# Altium PCB RC_Filters_MicroD.PcbDoc
Units mm, origin at the board's own origin, x right, y up, seen from the top; angles counter-clockwise.
Board outline 25 x 45 mm, 2 copper layers (Top Layer, Bottom Layer); 52 components, 51 nets, 156 pads, 85 vias.
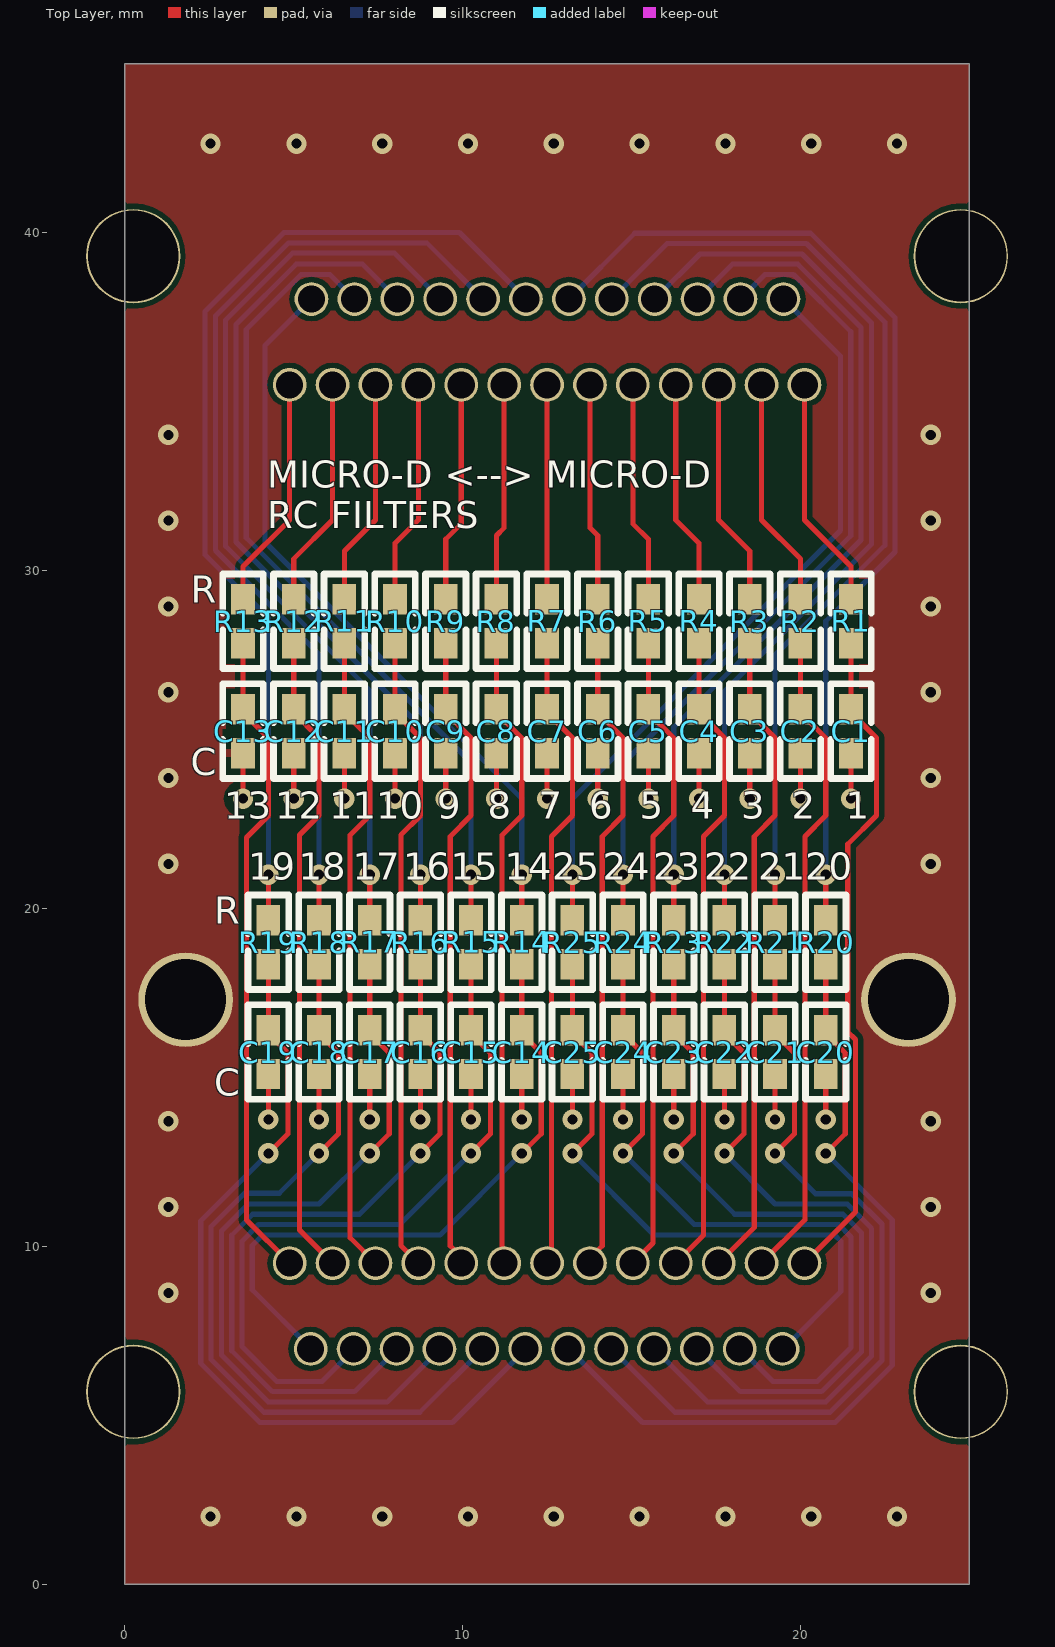
[diagram p0: Top Layer view]
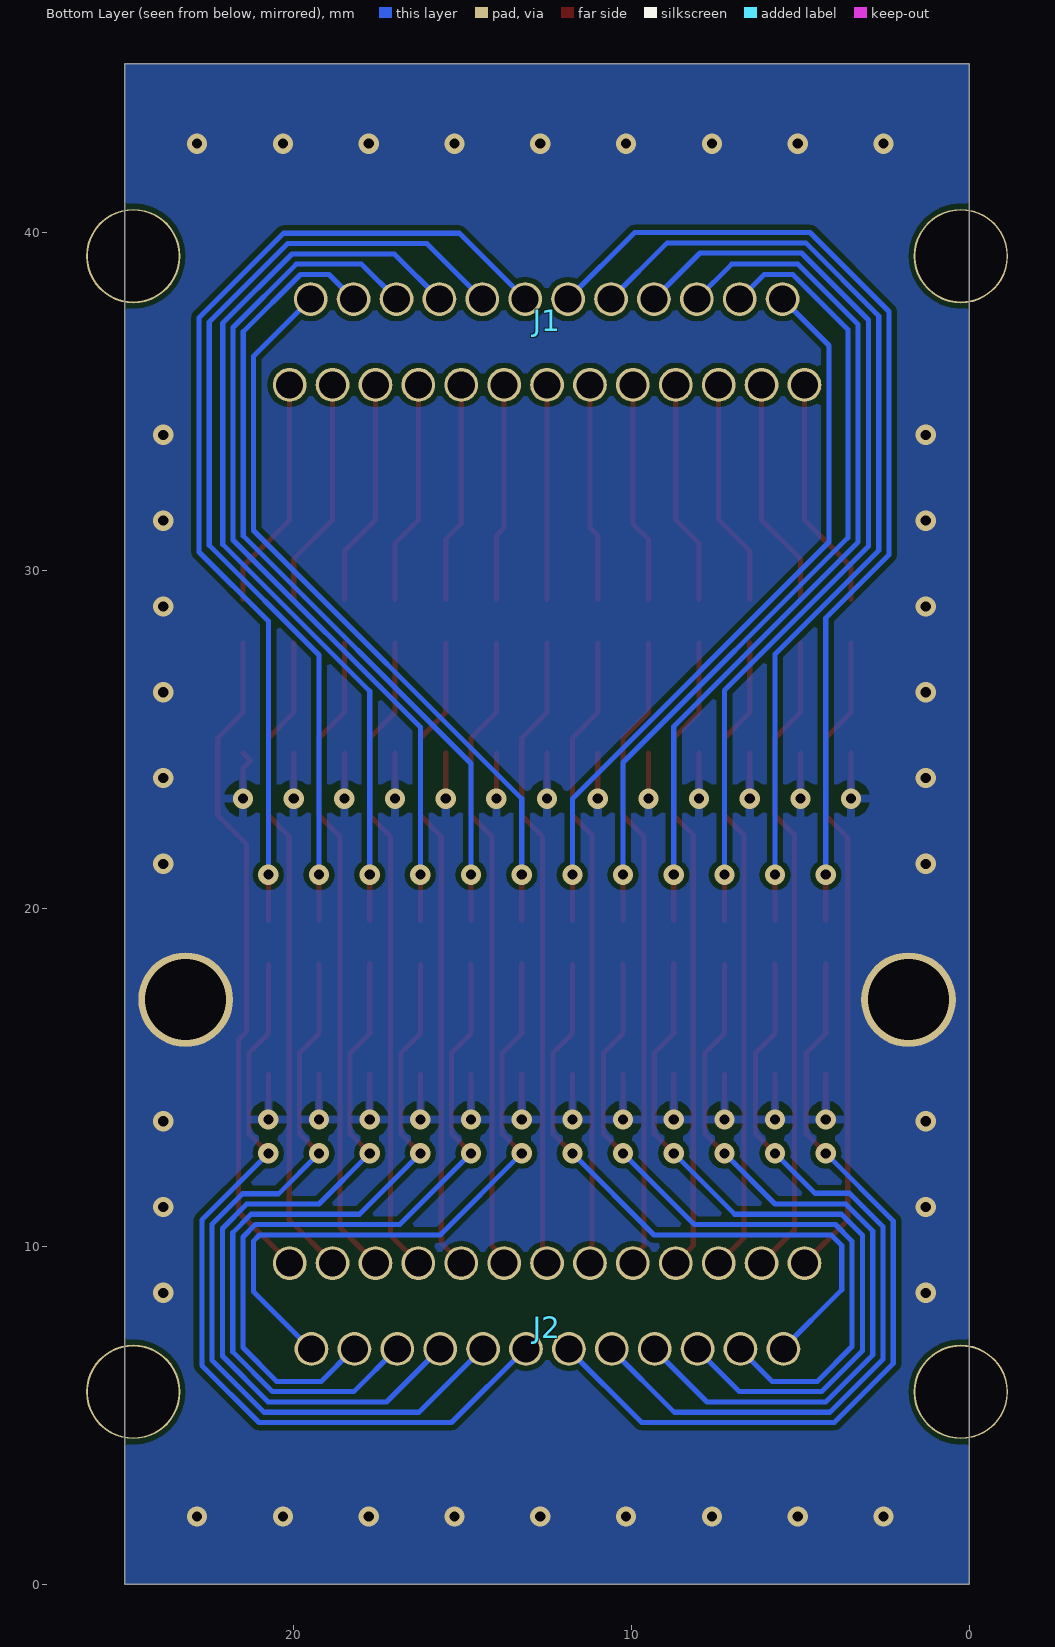
[diagram p1: Bottom Layer view, seen from below]
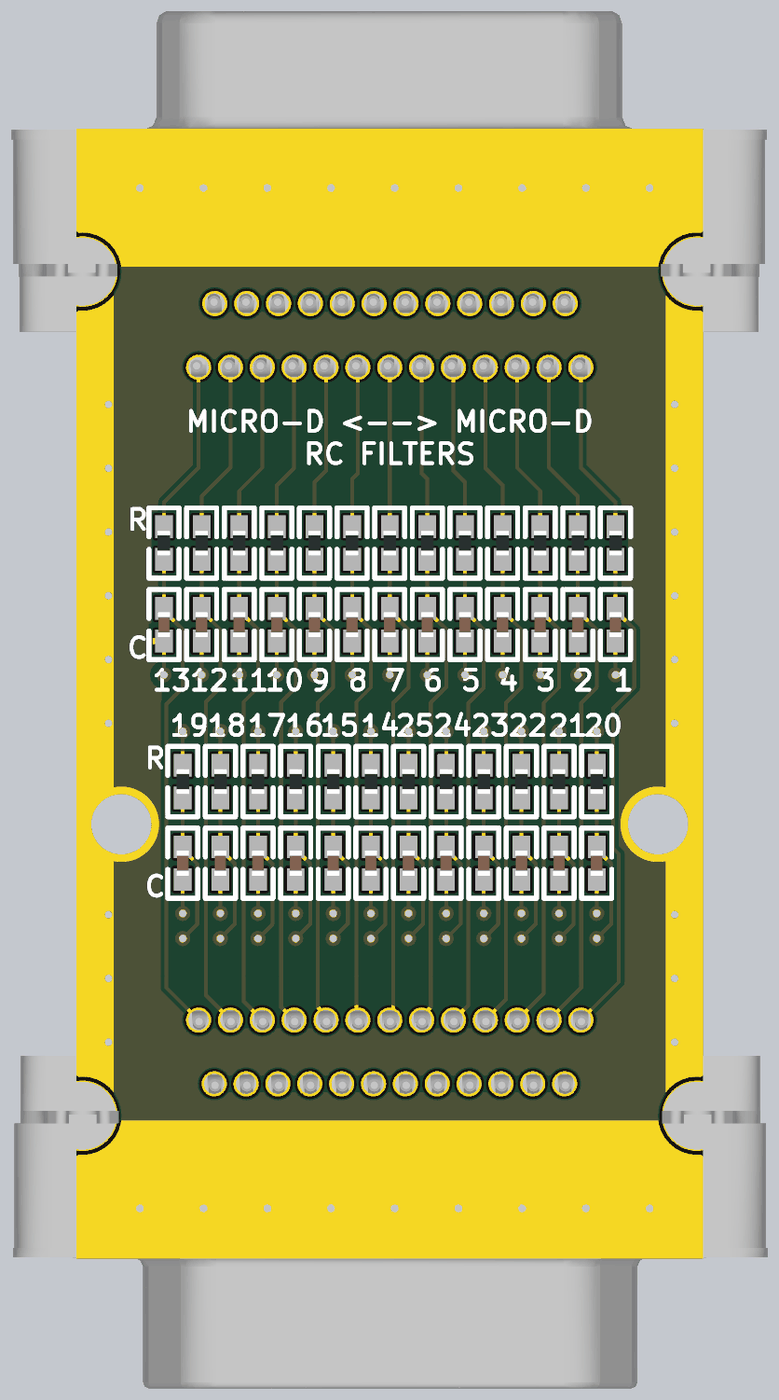
[diagram p2: 3D render of the assembled board from above, using the file's embedded part models]

## Layer stack, top to bottom
Top Solder: solder mask 0.0102, Solder Resist, Dk 3.5
Top Layer: signal copper 0.0356
Dielectric 1: dielectric 0.32, FR-4, Dk 4.8
Bottom Layer: signal copper 0.0356
Bottom Solder: solder mask 0.0102, Solder Resist, Dk 3.5

## Board outline
0,0 25,0 25,45 0,45

## Design rules (kind name [scope] priority, off if disabled: settings)
Clearance [All] p1: gap=0.152 ignorepadtopadclearanceinfootprint=FALSE except(0: Arc-Hole Track-Hole SMDPad-Hole THPad-Hole Via-Hole Fill-Hole Poly-Hole Region-Hole Text-Hole)
HoleSize [All] p1: absolutevalues=TRUE maxlimit=2.8 minlimit=0.025 maxpercent=80.000 minpercent=20.000
MinimumSolderMaskSliver [All] p1: minsoldermaskwidth=0.06
PolygonConnect PolygonConnect_Stitch [IsStitchingVia] p1: thpad.connectstyle=Relief thpad.reliefconductorwidth=0.254 thpad.reliefentries=4 thpad.polygonreliefangle="90 Angle" thpad.airgapwidth=0.254 smdpad.connectstyle=Relief smdpad.reliefconductorwidth=0.254 smdpad.reliefentries=4 smdpad.polygonreliefangle="90 Angle" smdpad.airgapwidth=0.254 via.connectstyle=Direct via.reliefconductorwidth=0.254 via.reliefentries=4 via.polygonreliefangle="90 Angle" via.airgapwidth=0.254
PolygonConnect [All] p2: thpad.connectstyle=Direct thpad.reliefconductorwidth=0.254 thpad.reliefentries=4 thpad.polygonreliefangle="90 Angle" thpad.airgapwidth=0.254 smdpad.connectstyle=Relief smdpad.reliefconductorwidth=0.254 smdpad.reliefentries=4 smdpad.polygonreliefangle="90 Angle" smdpad.airgapwidth=0.254 via.connectstyle=Relief via.reliefconductorwidth=0.254 via.reliefentries=4 via.polygonreliefangle="90 Angle" via.airgapwidth=0.254
RoutingVias [All] p1: holewidth=0.3 width=0.6 viastyle="Through Hole" minholewidth=0.3 minwidth=0.6 maxholewidth=0.5 maxwidth=1
SilkToSilkClearance [All] p1: silktosilkclearance=0
SilkToSolderMaskClearance [IsPad] p1: minsilkscreentomaskgap=0.127 clearancetoexposedcopper=TRUE
SolderMaskExpansion SolderMaskExpansion_Via [IsVia] p1: expansion=0.102 istentingtop=TRUE
SolderMaskExpansion [All] p2: expansion=0.102 istentingtop=FALSE
Width [All] p1: maxlimit=0.254 minlimit=0.127 preferedwidth=0.152
26 further rules are at their usual default settings.

## Components (designator, comment, footprint, x,y, rotation, side; value= is the part's Value field where it differs from the comment)
C1 "Capacitor" C0402 21.5,25.25 r90 top
C2 "Capacitor" C0402 20,25.25 r90 top
C3 "Capacitor" C0402 18.5,25.25 r90 top
C4 "Capacitor" C0402 17,25.25 r90 top
C5 "Capacitor" C0402 15.5,25.25 r90 top
C6 "Capacitor" C0402 14,25.25 r90 top
C7 "Capacitor" C0402 12.5,25.25 r90 top
C8 "Capacitor" C0402 11,25.25 r90 top
C9 "Capacitor" C0402 9.5,25.25 r90 top
C10 "Capacitor" C0402 8,25.25 r90 top
C11 "Capacitor" C0402 6.5,25.25 r90 top
C12 "Capacitor" C0402 5,25.25 r90 top
C13 "Capacitor" C0402 3.5,25.25 r90 top
C14 "Capacitor" C0402 11.75,15.75 r90 top
C15 "Capacitor" C0402 10.25,15.75 r90 top
C16 "Capacitor" C0402 8.75,15.75 r90 top
C17 "Capacitor" C0402 7.25,15.75 r90 top
C18 "Capacitor" C0402 5.75,15.75 r90 top
C19 "Capacitor" C0402 4.25,15.75 r90 top
C20 "Capacitor" C0402 20.75,15.75 r90 top
C21 "Capacitor" C0402 19.25,15.75 r90 top
C22 "Capacitor" C0402 17.75,15.75 r90 top
C23 "Capacitor" C0402 16.25,15.75 r90 top
C24 "Capacitor" C0402 14.75,15.75 r90 top
C25 "Capacitor" C0402 13.25,15.75 r90 top
J1 "MICRO_DSUB_25" 581-M25-113L461 12.5,35.5 r0 bottom
J2 "MICRO_DSUB_25" 581-M25-213L461 12.5,9.5 r180 bottom
R1 "Resistor" R0402 21.5,28.5 r270 top
R2 "Resistor" R0402 20,28.5 r270 top
R3 "Resistor" R0402 18.5,28.5 r270 top
R4 "Resistor" R0402 17,28.5 r270 top
R5 "Resistor" R0402 15.5,28.5 r270 top
R6 "Resistor" R0402 14,28.5 r270 top
R7 "Resistor" R0402 12.5,28.5 r270 top
R8 "Resistor" R0402 11,28.5 r270 top
R9 "Resistor" R0402 9.5,28.5 r270 top
R10 "Resistor" R0402 8,28.5 r270 top
R11 "Resistor" R0402 6.5,28.5 r270 top
R12 "Resistor" R0402 5,28.5 r270 top
R13 "Resistor" R0402 3.5,28.5 r270 top
R14 "Resistor" R0402 11.75,19 r270 top
R15 "Resistor" R0402 10.25,19 r270 top
R16 "Resistor" R0402 8.75,19 r270 top
R17 "Resistor" R0402 7.25,19 r270 top
R18 "Resistor" R0402 5.75,19 r270 top
R19 "Resistor" R0402 4.25,19 r270 top
R20 "Resistor" R0402 20.75,19 r270 top
R21 "Resistor" R0402 19.25,19 r270 top
R22 "Resistor" R0402 17.75,19 r270 top
R23 "Resistor" R0402 16.25,19 r270 top
R24 "Resistor" R0402 14.75,19 r270 top
R25 "Resistor" R0402 13.25,19 r270 top

## Footprints (in the part's own frame and the unit in brackets; to place one, negate y for a bottom-side part, rotate by r counter-clockwise, add the part's x,y. Pads: shape width x height; smd on the part's side, far side on the other; paste and mask are expansions set on the pad)
581-M25-113L461 [mm] "CONN MICRO-D MALE 25P RA"
  round 1 hole 0.8: 1(7.62,0) 2(6.35,0) 3(5.08,0) 4(3.81,0) 5(2.54,0) 6(1.27,0) 7(0,0) 8(-1.27,0) 9(-2.54,0) 10(-3.81,0) 11(-5.08,0) 12(-6.35,0) 13(-7.62,0) 14(-6.973,-2.54) 15(-5.703,-2.54) 16(-4.433,-2.54) 17(-3.163,-2.54) 18(-1.893,-2.54) 19(-0.623,-2.54) 20(0.647,-2.54) 21(1.917,-2.54) 22(3.187,-2.54) 23(4.457,-2.54) 24(5.727,-2.54) 25(6.997,-2.54)
  round 2.8 hole 2.69: M1(-12.25,-3.81) M2(12.25,-3.81)
  body extent -15.07,-14.19 15.03,0.88, height 7.9
581-M25-213L461 [mm] "CONN MICRO-D FEMALE 25P RA"
  round 1 hole 0.8: 1(-7.62,0) 2(-6.35,0) 3(-5.08,0) 4(-3.81,0) 5(-2.54,0) 6(-1.27,0) 7(0,0) 8(1.27,0) 9(2.54,0) 10(3.81,0) 11(5.08,0) 12(6.35,0) 13(7.62,0) 14(6.997,-2.54) 15(5.727,-2.54) 16(4.457,-2.54) 17(3.187,-2.54) 18(1.917,-2.54) 19(0.647,-2.54) 20(-0.623,-2.54) 21(-1.893,-2.54) 22(-3.163,-2.54) 23(-4.433,-2.54) 24(-5.703,-2.54) 25(-6.973,-2.54)
  round 2.8 hole 2.69: M1(-12.25,-3.81) M2(12.25,-3.81)
  body extent -15.07,-14.67 15.03,0.88, height 7.9
C0402 [mm]
  rect 0.9x0.7 smd: 0(-0.65,0) 1(0.65,0)
  silkscreen extent -1.4,-0.6 1.4,0.6, body extent -0.5,-0.25 0.5,0.25, height 0.5
R0402 [mm]
  rect 0.9x0.7 smd: 0(-0.65,0) 1(0.65,0)
  silkscreen extent -1.4,-0.6 1.4,0.6, body extent -0.5,-0.25 0.5,0.25, height 0.35

## Part data
J1 J2: "Micro D-Sub 25 pin connector"

## Free pads (board coordinates)
  round 2.8 hole 2.4: ""(1.8,17.3) ""(23.2,17.3)

## Via types
v1: diameter 0.6, hole 0.3, Top Layer to Bottom Layer, tented both sides, 85 vias

## Nets (pads, with @x,y where several pads share a name; then routed paths per layer and width w, separated by ;. In a path a pad name is that pad's centre, name@x,y a point inside that pad or via, vN(x,y) a via of type N, cw(c..) or ccw(c..) an arc to the next point about the centre after c; other vN are vias at no path point)
1: J1.1 R1.0 | length 6.9
  Top Layer w0.152: J1.1 20.12,31.5 21.5,30.12 R1.0
1F: C1.1 J2.1 R1.1 | length 19.7
  Top Layer w0.152: J2.1 21.633,11.013 21.633,16.117 21.4,16.35 21.4,21.9 22.25,22.75 22.25,25.05 21.5,25.8 C1.1 R1.1
2: J1.2 R2.0 | length 6.8
  Top Layer w0.152: J1.2 18.85,31.5 20,30.35 R2.0
2F: C2.1 J2.2 R2.1 | length 19.4
  Top Layer w0.152: J2.2 20.133,10.783 20.133,22.133 20.75,22.75 20.75,25.05 20,25.8 C2.1 R2.1
3: J1.3 R3.0 | length 6.7
  Top Layer w0.152: J1.3 17.58,31.5 18.5,30.58 R3.0
3F: C3.1 J2.3 R3.1 | length 19.4
  Top Layer w0.152: J2.3 18.633,10.553 18.633,22.133 19.25,22.75 19.25,25.05 18.5,25.8 C3.1 R3.1
4: J1.4 R4.0 | length 6.6
  Top Layer w0.152: J1.4 16.31,31.5 17,30.81 R4.0
4F: C4.1 J2.4 R4.1 | length 19.3
  Top Layer w0.152: J2.4 17.133,10.323 17.133,22.133 17.75,22.75 17.75,25.05 17,25.8 C4.1 R4.1
5: J1.5 R5.0 | length 6.5
  Top Layer w0.152: J1.5 15.04,31.39 15.5,30.93 R5.0
5F: C5.1 J2.5 R5.1 | length 19.2
  Top Layer w0.152: J2.5 15.633,10.093 15.633,22.133 16.25,22.75 16.25,25.05 15.5,25.8 C5.1 R5.1
6: J1.6 R6.0 | length 6.4
  Top Layer w0.152: J1.6 13.77,31.271 14,31.041 R6.0
6F: C6.1 J2.6 R6.1 | length 19.1
  Top Layer w0.152: J2.6 13.77,9.65 14.133,10.013 14.133,22.133 14.75,22.75 14.75,25.05 14,25.8 C6.1 R6.1
7: J1.7 R7.0 | length 6.3
  Top Layer w0.152: R7.0 J1.7
7F: C7.1 J2.7 R7.1 | length 19
  Top Layer w0.152: J2.7 12.633,9.633 12.633,22.133 13.25,22.75 13.25,25.05 12.5,25.8 C7.1 R7.1
8: J1.8 R8.0 | length 6.4
  Top Layer w0.152: R8.0 11,31.041 11.23,31.271 J1.8
8F: C8.1 J2.8 R8.1 | length 18.9
  Top Layer w0.152: R8.1 C8.1 11,25.8 11.75,25.05 11.75,22.75 11.171,22.171 11.171,9.559 J2.8
9: J1.9 R9.0 | length 6.5
  Top Layer w0.152: R9.0 9.5,30.93 9.96,31.39 J1.9
9F: C9.1 J2.9 R9.1 | length 19.1
  Top Layer w0.152: R9.1 C9.1 9.5,25.8 10.25,25.05 10.25,22.75 9.633,22.133 9.633,10.013 9.96,9.686 J2.9
10: J1.10 R10.0 | length 6.6
  Top Layer w0.152: R10.0 8,30.81 8.69,31.5 J1.10
10F: C10.1 J2.10 R10.1 | length 19.1
  Top Layer w0.152: R10.1 C10.1 8,25.8 8.75,25.05 8.75,22.75 8.171,22.171 8.171,10.019 J2.10
11: J1.11 R11.0 | length 6.7
  Top Layer w0.152: R11.0 6.5,30.58 7.42,31.5 J1.11
11F: C11.1 J2.11 R11.1 | length 19.2
  Top Layer w0.152: R11.1 C11.1 6.5,25.8 7.25,25.05 7.25,22.75 6.671,22.171 6.671,10.249 J2.11
12: J1.12 R12.0 | length 6.8
  Top Layer w0.152: R12.0 5,30.35 6.15,31.5 J1.12
12F: C12.1 J2.12 R12.1 | length 19.3
  Top Layer w0.152: R12.1 C12.1 5,25.8 5.75,25.05 5.75,22.75 5.171,22.171 5.171,10.479 J2.12
13: J1.13 R13.0 | length 6.9
  Top Layer w0.152: R13.0 3.5,30.12 4.88,31.5 J1.13
13F: C13.1 J2.13 R13.1 | length 19.5
  Top Layer w0.152: R13.1 C13.1 3.5,25.8 4.25,25.05 4.25,22.75 3.6,22.1 3.6,10.78 J2.13
14: J1.14 R14.0 | length 22.3
  Top Layer w0.152: R14.0 v1(11.75,21)
  Bottom Layer w0.152: J1.14 4.151,36.664 4.151,30.849 11.75,23.25 v1@11.75,20.85
14F: C14.1 J2.14 R14.1 | length 19
  Top Layer w0.152: v1(11.75,12.75) 12.329,13.329 12.329,15.721 11.75,16.3 C14.1 R14.1
  Bottom Layer w0.152: J2.14@5.527,6.96 3.774,8.713 3.774,10.024 4.086,10.336 9.336,10.336 v1(11.75,12.75)
15: J1.15 R15.0 | length 24.6
  Top Layer w0.152: R15.0 v1(10.25,21)
  Bottom Layer w0.152: J1.15 6.068,38.768 5.225,38.768 3.595,37.139 3.595,30.974 10.25,24.319 v1@10.25,20.85
15F: C15.1 J2.15 R15.1 | length 21.2
  Top Layer w0.152: v1(10.25,12.75) 10.829,13.329 10.829,15.721 10.25,16.3 C15.1 R15.1
  Bottom Layer w0.152: J2.15@6.797,6.96 5.836,6 4.5,6 3.469,7.031 3.469,10.15 3.959,10.64 8.14,10.64 v1(10.25,12.75)
16: J1.16 R16.0 | length 26
  Top Layer w0.152: R16.0 v1(8.75,21)
  Bottom Layer w0.152: J1.16 7.033,39.073 5.073,39.073 3.29,37.29 3.29,30.847 8.75,25.388 v1@8.75,20.85
16F: C16.1 J2.16 R16.1 | length 22
  Top Layer w0.152: v1(8.75,12.75) 9.329,13.329 9.329,15.721 8.75,16.3 C16.1 R16.1
  Bottom Layer w0.152: J2.16@8.067,6.96 6.801,5.695 4.374,5.695 3.164,6.905 3.164,10.325 3.784,10.945 6.945,10.945 v1(8.75,12.75)
17: J1.17 R17.0 | length 27.4
  Top Layer w0.152: R17.0 v1(7.25,21)
  Bottom Layer w0.152: v1@7.25,20.85 7.25,26.457 2.986,30.721 2.986,37.417 4.969,39.4 7.976,39.4 J1.17
17F: C17.1 J2.17 R17.1 | length 22.8
  Top Layer w0.152: v1(7.25,12.75) 7.829,13.329 7.829,15.721 7.25,16.3 C17.1 R17.1
  Bottom Layer w0.152: v1(7.25,12.75) 5.75,11.25 3.658,11.25 2.86,10.451 2.86,6.778 4.247,5.39 7.767,5.39 J2.17@9.337,6.96
18: J1.18 R18.0 | length 28.8
  Top Layer w0.152: R18.0 v1(5.75,21)
  Bottom Layer w0.152: v1@5.75,20.85 5.75,27.526 2.681,30.595 2.681,37.543 4.843,39.705 8.941,39.705 J1.18
18F: C18.1 J2.18 R18.1 | length 23.6
  Top Layer w0.152: v1(5.75,12.75) 6.329,13.329 6.329,15.721 5.75,16.3 C18.1 R18.1
  Bottom Layer w0.152: v1(5.75,12.75) 4.57,11.57 3.548,11.57 2.555,10.578 2.555,6.652 4.121,5.086 8.732,5.086 J2.18@10.607,6.96
19: J1.19 R19.0 | length 30.2
  Top Layer w0.152: R19.0 v1(4.25,21)
  Bottom Layer w0.152: v1@4.25,20.85 4.25,28.595 2.376,30.469 2.376,37.669 4.716,40.01 9.907,40.01 J1.19
19F: C19.1 J2.19 R19.1 | length 24.4
  Top Layer w0.152: v1(4.25,12.75) 4.829,13.329 4.829,15.721 4.25,16.3 C19.1 R19.1
  Bottom Layer w0.152: v1(4.25,12.75) 2.25,10.75 2.25,6.526 3.995,4.781 9.697,4.781 J2.19@11.877,6.96
20: J1.20 R20.0 | length 30.2
  Top Layer w0.152: R20.0 v1(20.75,21)
  Bottom Layer w0.152: J1.20 15.094,39.987 20.303,39.987 22.805,37.486 22.805,30.555 20.75,28.5 v1(20.75,21)
20F: C20.1 J2.20 R20.1 | length 24.4
  Top Layer w0.152: v1(20.75,12.75) 21.329,13.329 21.329,15.721 20.75,16.3 C20.1 R20.1
  Bottom Layer w0.152: J2.20@13.147,6.96 15.326,4.781 21.031,4.781 22.719,6.469 22.719,10.781 v1(20.75,12.75)
21: J1.21 R21.0 | length 28.8
  Top Layer w0.152: R21.0 v1(19.25,21)
  Bottom Layer w0.152: J1.21 16.06,39.683 20.177,39.683 22.5,37.36 22.5,30.75 19.25,27.5 v1(19.25,21)
21F: C21.1 J2.21 R21.1 | length 23.6
  Top Layer w0.152: v1(19.25,12.75) 19.829,13.329 19.829,15.721 19.25,16.3 C21.1 R21.1
  Bottom Layer w0.152: J2.21@14.417,6.96 16.291,5.086 20.879,5.086 22.414,6.621 22.414,10.655 21.514,11.555 20.445,11.555 v1(19.25,12.75)
22: J1.22 R22.0 | length 27.3
  Top Layer w0.152: R22.0 v1(17.75,21)
  Bottom Layer w0.152: J1.22 17.025,39.378 20.051,39.378 22.101,37.327 22.101,30.782 17.75,26.431 v1(17.75,21)
22F: C22.1 J2.22 R22.1 | length 22.8
  Top Layer w0.152: v1(17.75,12.75) 18.329,13.329 18.329,15.721 17.75,16.3 C22.1 R22.1
  Bottom Layer w0.152: J2.22@15.687,6.96 17.257,5.39 20.753,5.39 22.11,6.747 22.11,10.528 21.388,11.25 19.25,11.25 v1(17.75,12.75)
23: J1.23 R23.0 | length 25.9
  Top Layer w0.152: R23.0 v1(16.25,21)
  Bottom Layer w0.152: v1(16.25,21) 16.25,25.362 21.796,30.909 21.796,37.201 19.925,39.073 17.99,39.073 J1.23
23F: C23.1 J2.23 R23.1 | length 22
  Top Layer w0.152: v1(16.25,12.75) 16.829,13.329 16.829,15.721 16.25,16.3 C23.1 R23.1
  Bottom Layer w0.152: v1(16.25,12.75) 18.055,10.945 21.262,10.945 21.805,10.402 21.805,6.874 20.626,5.695 18.222,5.695 J2.23@16.957,6.96
24: J1.24 R24.0 | length 24.5
  Top Layer w0.152: R24.0 v1(14.75,21)
  Bottom Layer w0.152: v1(14.75,21) 14.75,24.293 21.492,31.035 21.492,37.075 19.798,38.768 18.955,38.768 J1.24
24F: C24.1 J2.24 R24.1 | length 21.2
  Top Layer w0.152: v1(14.75,12.75) 15.329,13.329 15.329,15.721 14.75,16.3 C24.1 R24.1
  Bottom Layer w0.152: v1(14.75,12.75) 16.86,10.64 21.135,10.64 21.5,10.276 21.5,7 20.5,6 19.187,6 J2.24@18.227,6.96
25: J1.25 R25.0 | length 22.4
  Top Layer w0.152: R25.0 v1(13.25,21)
  Bottom Layer w0.152: v1(13.25,21) 13.25,23.25 21.187,31.187 21.187,36.349 J1.25
25F: C25.1 J2.25 R25.1 | length 19
  Top Layer w0.152: v1(13.25,12.75) 13.829,13.329 13.829,15.721 13.25,16.3 C25.1 R25.1
  Bottom Layer w0.152: v1(13.25,12.75) 15.664,10.336 21.009,10.336 21.195,10.15 21.195,8.659 J2.25@19.497,6.96
COM: C1.0 C2.0 C3.0 C4.0 C5.0 C6.0 C7.0 C8.0 C9.0 C10.0 C11.0 C12.0 C13.0 C14.0 C15.0 C16.0 C17.0 C18.0 C19.0 C20.0 C21.0 C22.0 C23.0 C24.0 C25.0 pad. | length 33.9
  Top Layer w0.152: v1(3.5,23.25) C13.0 ; v1(4.25,13.75) C19.0 ; v1(5,23.25) C12.0 ; v1(5.75,13.75) C18.0 ; v1(6.5,23.25) C11.0 ; v1(7.25,13.75) C17.0 ; v1(8,23.25) C10.0 ; v1(8.75,13.75) C16.0 ; v1(9.5,23.25) C9.0 ; v1(10.25,13.75) C15.0 ; v1(11,23.25) C8.0 ; v1(11.75,13.75) C14.0 ; v1(12.5,23.25) C7.0 ; v1(13.25,13.75) C25.0 ; v1(14,23.25) C6.0 ; v1(14.75,13.75) C24.0 ; v1(15.5,23.25) C5.0 ; v1(16.25,13.75) C23.0 ; v1(17,23.25) C4.0 ; v1(17.75,13.75) C22.0 ; v1(18.5,23.25) C3.0 ; v1(19.25,13.75) C21.0 ; v1(20,23.25) C2.0 ; v1(20.75,13.75) C20.0 ; v1(21.5,23.25) 21.5,24.157 21.279,24.379 C1.0
  other v1: 2.54,2 5.08,2 7.62,2 10.16,2 12.7,2 15.24,2 17.78,2 20.32,2 22.86,2 1.29,8.62 23.86,8.62 1.29,11.16 23.86,11.16 1.29,13.7 23.86,13.7 1.29,21.32 23.86,21.32 1.29,23.86 23.86,23.86 1.29,26.4 23.86,26.4 1.29,28.94 23.86,28.94 1.29,31.48 23.86,31.48 1.29,34.02 23.86,34.02 2.54,42.64 5.08,42.64 7.62,42.64 10.16,42.64 12.7,42.64 15.24,42.64 17.78,42.64 20.32,42.64 22.86,42.64
pads on no net: J1.M1 J1.M2 J2.M1 J2.M2

## Polygon pours and split planes (outlines as drawn)
COM on Bottom Layer "NONET_L-01_P-001" (solid, remove dead copper, pour order 0): 0,45 25,45 25,0 0,0
COM on Top Layer "NONET_L-01_P-001" (solid, remove dead copper, pour order 1): 0,45 25,45 25,0 0,0

## Other copper
Top Layer:
  pour cut-out: 3.4,24.25 21.6,24.25 21.6,12.25 3.4,12.25
  pour cut-out: 2.75,23.25

## Silkscreen, mask and mechanical layers (free items; w line width, h text height)
Top Overlay:
  text "MICRO-D <--> MICRO-D / RC FILTERS" at 4.224,31.25 h0.8
  text "R" at 1.95,29.05 h0.8
  text "C" at 1.95,23.95 h0.8
  text "13" at 2.95,22.65 h0.8
  text "12" at 4.45,22.65 h0.8
  text "11" at 6.05,22.65 h0.8
  text "10" at 7.45,22.65 h0.8
  text "9" at 9.25,22.65 h0.8
  text "8" at 10.75,22.65 h0.8
  text "7" at 12.25,22.65 h0.8
  text "6" at 13.75,22.65 h0.8
  text "5" at 15.25,22.65 h0.8
  text "4" at 16.75,22.65 h0.8
  text "3" at 18.25,22.65 h0.8
  text "2" at 19.75,22.65 h0.8
  text "1" at 21.35,22.65 h0.8
  text "19" at 3.65,20.85 h0.8
  text "18" at 5.15,20.85 h0.8
  text "17" at 6.75,20.85 h0.8
  text "16" at 8.25,20.85 h0.8
  text "15" at 9.65,20.85 h0.8
  text "14" at 11.25,20.85 h0.8
  text "25" at 12.65,20.85 h0.8
  text "24" at 14.15,20.85 h0.8
  text "23" at 15.65,20.85 h0.8
  text "22" at 17.15,20.85 h0.8
  text "21" at 18.75,20.85 h0.8
  text "20" at 20.15,20.85 h0.8
  text "R" at 2.65,19.55 h0.8
  text "C" at 2.65,14.45 h0.8
Top Solder:
  rectangle: 0,0 25,5.5
  rectangle: 0,39.5 25,45
  rectangle: 23.5,0 25,41
  rectangle: 0,0 1.5,41
Bottom Solder:
  rectangle: 23.5,0 25,45
  rectangle: 0,0 1.5,45
  rectangle: 0,0 25,3.75
  rectangle: 0,41.5 25,45
  rectangle: 0,14.3 25,20.3
Mechanical 1:
  lines w0.254: 0,0 0,41 25,41 25,0 0,0